# Altium PCB PCB1.PcbDoc
Units mm, origin at the board's own origin, x right, y up, seen from the top; angles counter-clockwise.
Board outline 109.9 x 81.78 mm, 2 copper layers (Top Layer, Bottom Layer), stack 0.98 mm thick; 50 components, 26 nets, 129 pads, 26 vias.
Unrouted connection lines stored in the file: 5.
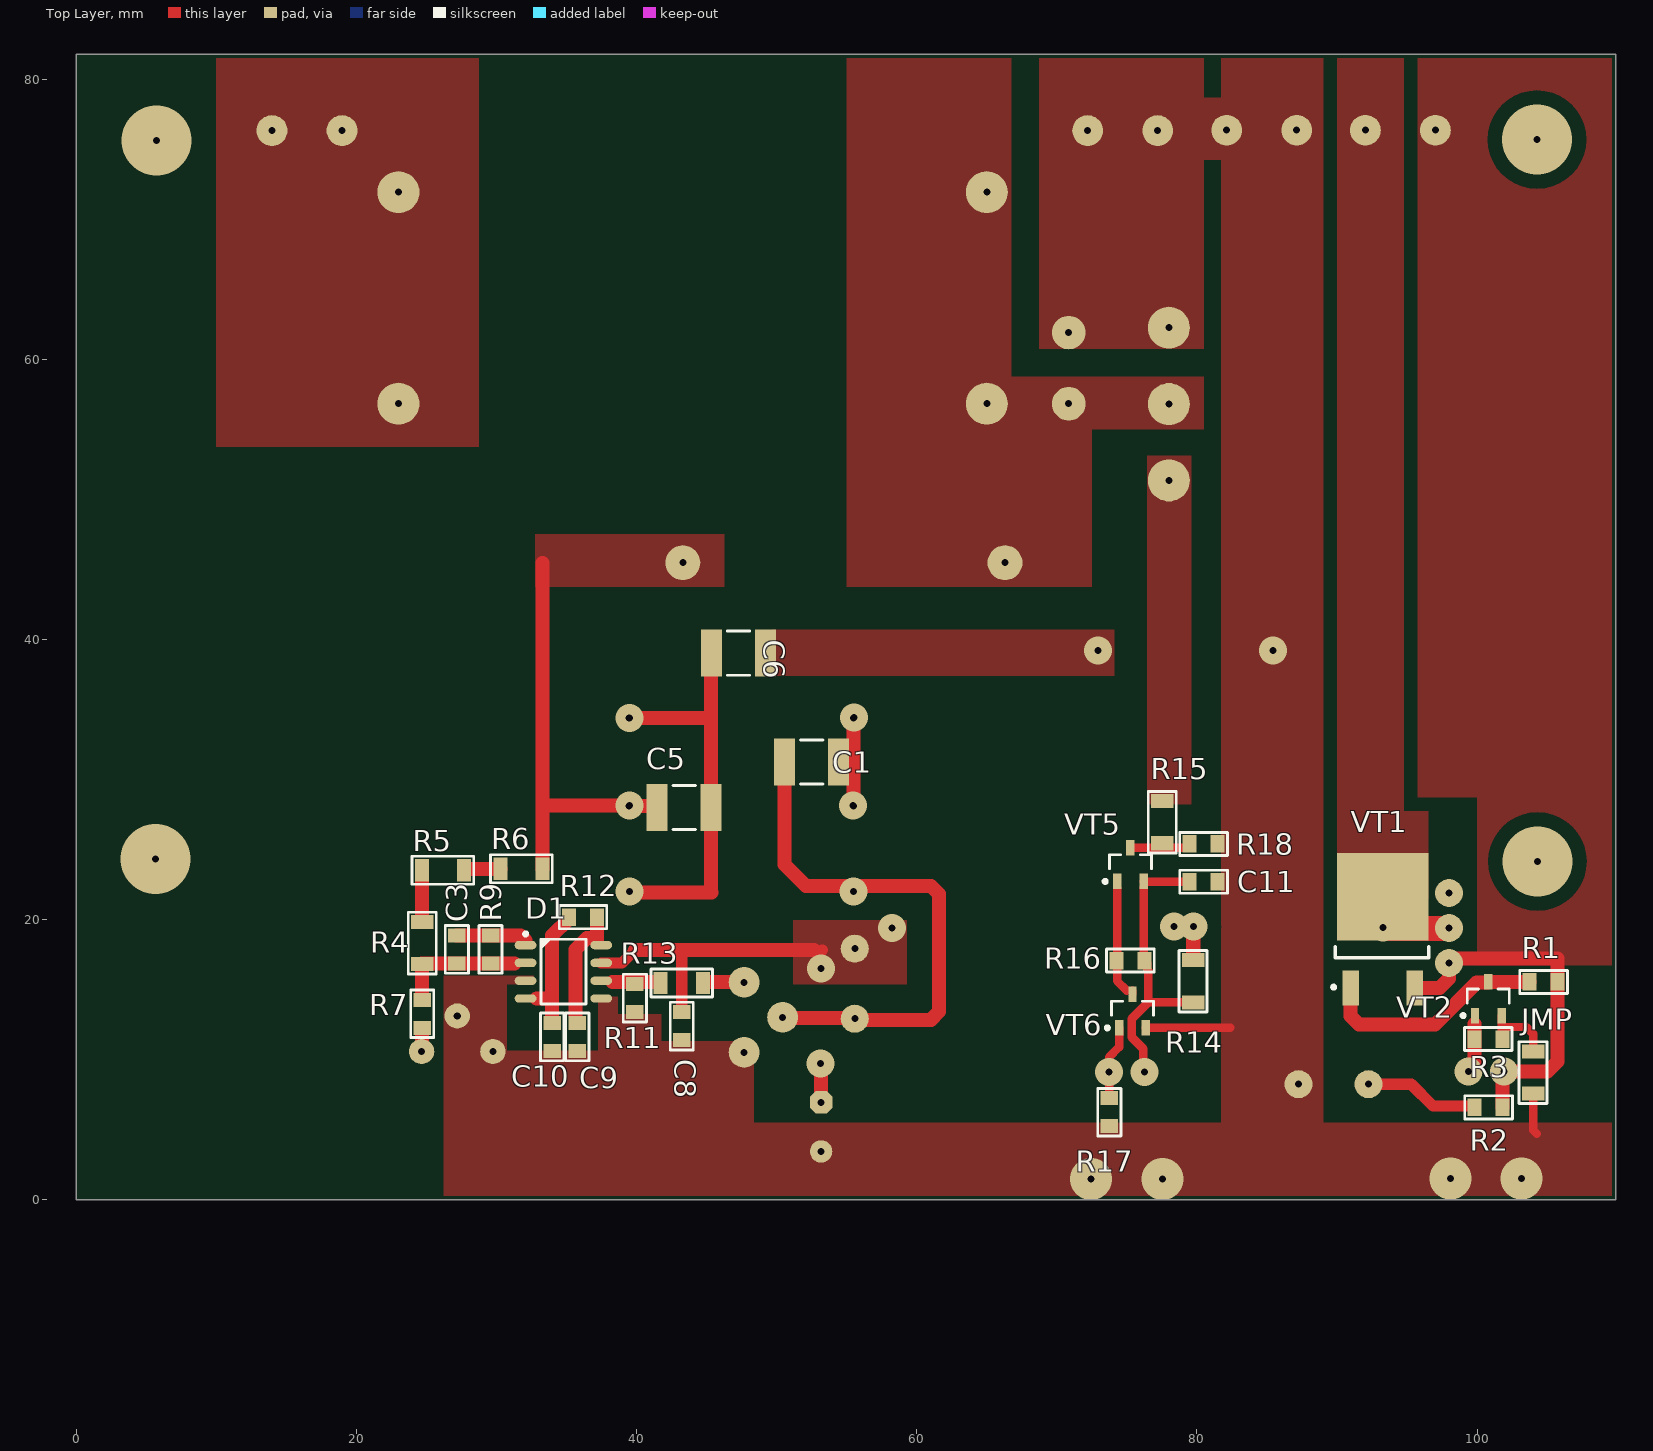
[diagram p0: Top Layer view]
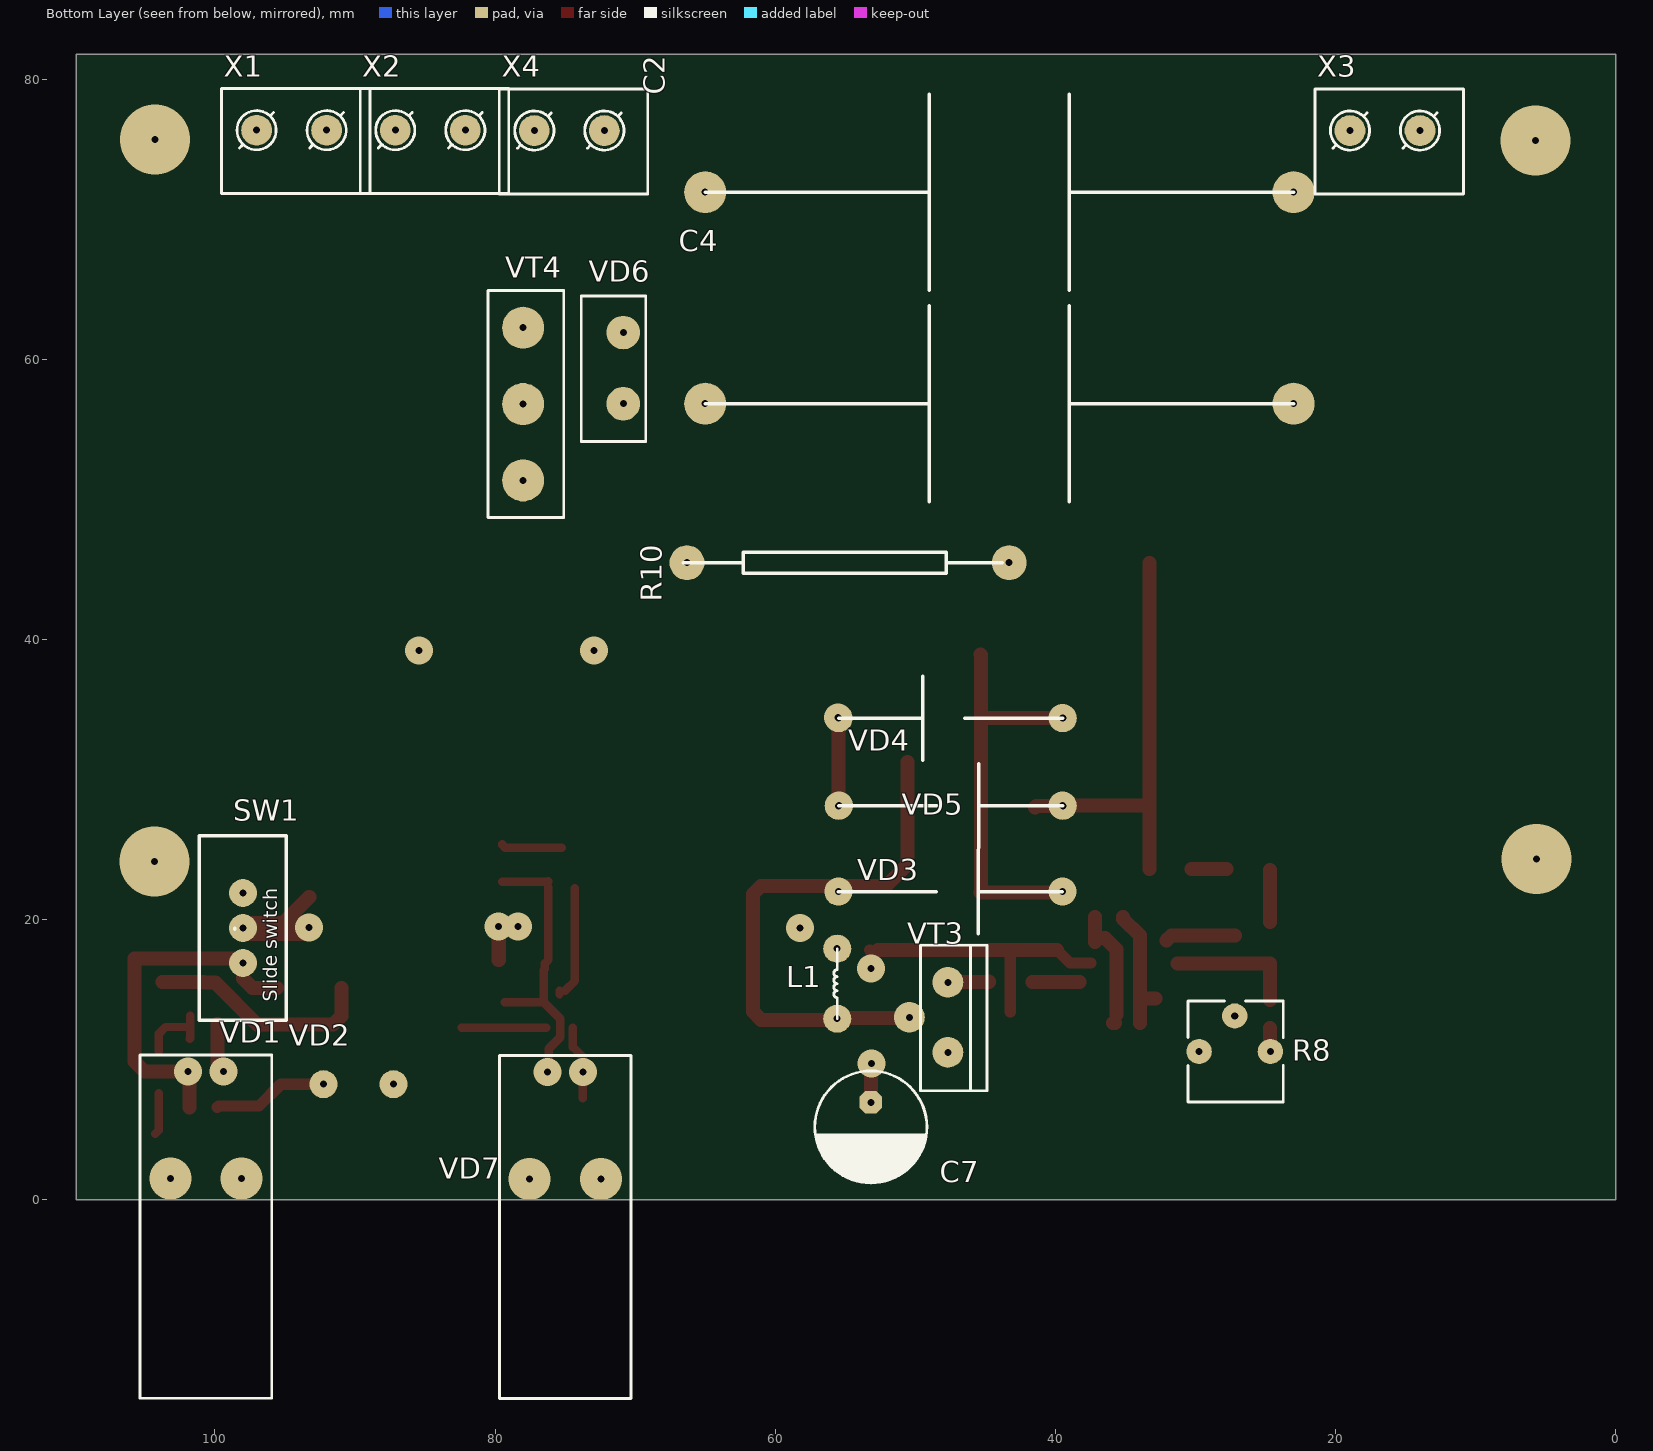
[diagram p1: Bottom Layer view, seen from below]
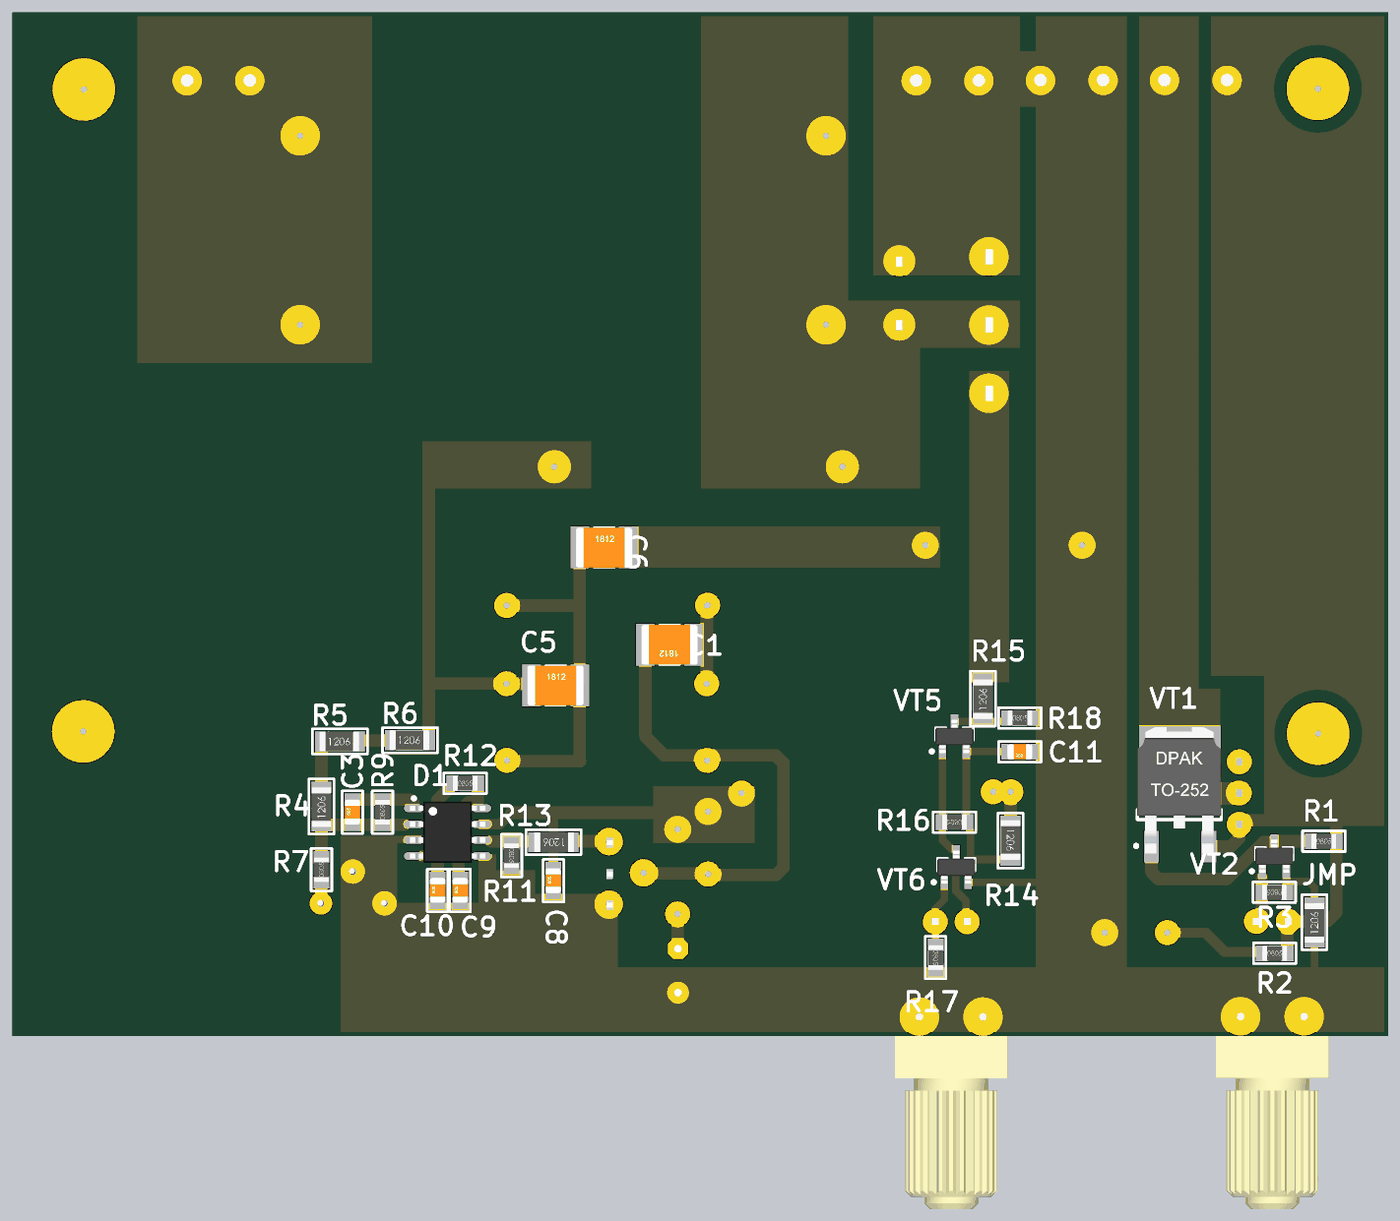
[diagram p2: 3D render of the assembled board from above, using the file's embedded part models]
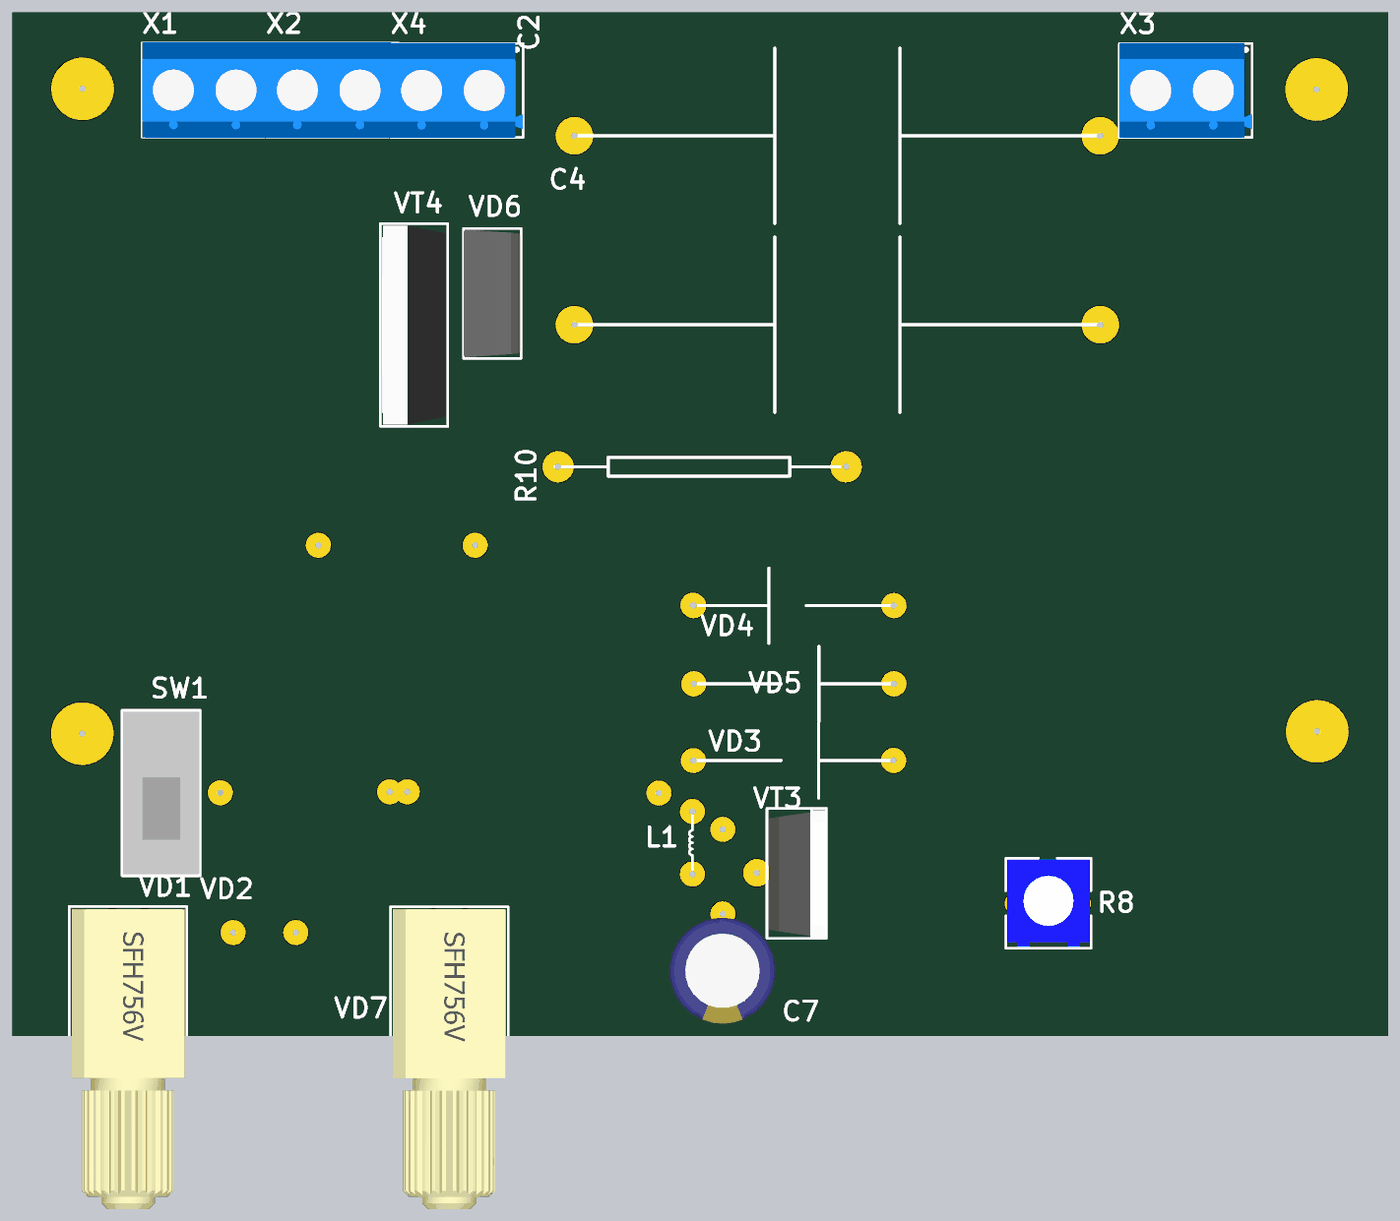
[diagram p3: 3D render of the assembled board from below, using the file's embedded part models]

## Layer stack, top to bottom
Top Solder: solder mask 0.0102, Solder Resist, Dk 3.5
Top Layer: signal copper 0.0356
Dielectric 1: dielectric 0.909, FR-4, Dk 4.8
Bottom Layer: signal copper 0.0356
Bottom Solder: solder mask 0.0102, Solder Resist, Dk 3.5

## Board outline
0,0 0,81.775 109.9,81.775 109.9,0

## Design rules (kind name [scope] priority, off if disabled: settings)
BoardOutlineClearance [All] p1: gap=0.3 ignorepadtopadclearanceinfootprint=FALSE
Clearance Clearance_MultiLayerPad [OnLayer('Multi-Layer') and IsPad] p1: gap=0.3 ignorepadtopadclearanceinfootprint=FALSE except(0: Arc-Hole Track-Hole SMDPad-Hole THPad-Hole Via-Hole Fill-Hole Poly-Hole Region-Hole Text-Hole)
Clearance Clearance_Polygon [InPolygon] p2: gap=0.2 ignorepadtopadclearanceinfootprint=FALSE except(0: Arc-Hole Track-Hole SMDPad-Hole THPad-Hole Via-Hole Fill-Hole Poly-Hole Region-Hole Text-Hole; 0.3: Arc-Poly Arc-Region Track-Poly Track-Region SMDPad-Poly SMDPad-Region THPad-Poly THPad-Region Via-Region Fill-Poly Fill-Region Poly-Poly Poly-Region Poly-Text Region-Region; 1: Via-Poly)
Clearance [All] p3: gap=0.2 ignorepadtopadclearanceinfootprint=FALSE except(0: Arc-Hole Track-Hole SMDPad-Hole THPad-Hole Via-Hole Fill-Hole Poly-Hole Region-Hole Text-Hole)
ComponentClearance [All] p1: gap=-5 collisioncheckmode=3 verticalgap=0.5 showdistances=FALSE
DiffPairsRouting [All] p1: maxlimit=0.4 minlimit=0.2 mostfreqgap=0.2 toplayer_minwidth=0.2 toplayer_maxwidth=0.3 toplayer_prefwidth=0.2 bottomlayer_minwidth=0.2 bottomlayer_maxwidth=0.3 bottomlayer_prefwidth=0.2 maxuncoupledlength=12.7
Height [All] p1: minheight=0 maxheight=50 prefheight=12.7
HoleSize [All] p1: absolutevalues=TRUE maxlimit=10 minlimit=0.2 maxpercent=80.000 minpercent=20.000
HoleToHoleClearance [All] p1: gap=0.3 allowstackedmicrovias=TRUE
MinimumSolderMaskSliver [All] p1: minsoldermaskwidth=0.2
PlaneClearance [All] p1: clearance=0
PlaneConnect [All] p1: planeconnectstyle=Direct reliefexpansion=0.5 reliefentries=4 reliefconductorwidth=0.5 reliefairgap=0.3
PolygonConnect PolygonConnect_PadGND [InNet('GND') and IsPad] p1: connectstyle=Direct reliefconductorwidth=0.5 reliefentries=4 polygonreliefangle="90 Angle" airgapwidth=0.3
PolygonConnect PolygonConnect_Via [IsVia] p2: connectstyle=Direct reliefconductorwidth=0.254 reliefentries=4 polygonreliefangle="90 Angle" airgapwidth=0.254
PolygonConnect [All] p3: connectstyle=Direct reliefconductorwidth=0.5 reliefentries=4 polygonreliefangle="90 Angle" airgapwidth=0.3
RoutingTopology [All] p1: topology=Vertical
RoutingVias [All] p1: holewidth=0.2 width=0.4 viastyle="Through Hole" minholewidth=0.2 minwidth=0.4 maxholewidth=0.5 maxwidth=1.2
SilkToSolderMaskClearance [IsPad] p1: minsilkscreentomaskgap=0.2 clearancetoexposedcopper=TRUE
SolderMaskExpansion [All] p1: expansion=0.075 istentingtop=FALSE
Width [All] p1: maxlimit=10 minlimit=0.2 preferedwidth=0.2
20 further rules are at their usual default settings.

## Components (designator, comment, footprint, x,y, rotation, side; value= is the part's Value field where it differs from the comment)
C1 "Ceramic capacitor, 0.068, X7R, ±10%, 630V, 1812, -55...+125°C" "CAP: 1812" 52.5,31.25 r180 top value=0.068
C2 "DHRB34C102M2FB 1000пФ х 15кВ" "CAP: HV_CYL_METALL-PAPER_CAP" 44,71.925 r0 bottom
C3 "Ceramic capacitor, 100pF, X7R, ±10%, 16V, 0805, -55...+125°C" "CAP: 0805" 27.175,17.875 r90 top value=100pF
C4 "DHRB34C102M2FB 1000пФ х 15кВ" "CAP: HV_CYL_METALL-PAPER_CAP" 44,56.825 r0 bottom
C5 "Ceramic capacitor, 0.068, X7R, ±10%, 630V, 1812, -55...+125°C" "CAP: 1812" 43.4,28 r0 top value=0.068
C6 "Ceramic capacitor, 0.068, X7R, ±10%, 630V, 1812, -55...+125°C" "CAP: 1812" 47.275,39.025 r0 top value=0.068
C7 "Aluminium capacitor, 470μF, 25V, ±20%, 54mOhm, 14x10x5 mm, -55...+105°C" "CAP: D8C3.5H12" 53.175,5.2 r270 bottom value=470μF
C8 "Ceramic capacitor, 1uF, X7R, ±10%, 16V, 0805, -55...+125°C" "CAP: 0805" 43.225,12.399 r90 top value=1uF
C9 "Ceramic capacitor, 1uF, X7R, ±10%, 16V, 0805, -55...+125°C" "CAP: 0805" 35.775,11.625 r90 top value=1uF
C10 "Ceramic capacitor, 2200pF, X7R, ±10%, 16V, 0805, -55...+125°C" "CAP: 0805" 33.975,11.625 r90 top value=2200pF
C11 "Ceramic capacitor, 4.7μF, X7R, ±10%, 16V, 0805, -55...+125°C" "CAP: 0805" 80.475,22.7 r180 top value=4.7μF
D1 "PWM controller, supply 10...30V, 500kHz, External switch, -40...+105°C, 8-SOIC" 8-SOIC 34.775,16.275 r0 top
JMP "Resistor film, 3R3, ±5%, 1206, 0.25W, -55...+125°C" "RES: 1206" 104,9.075 r90 top value=3R3 (schematic designator R15)
L1 "470uH" "IND: DUMBELL 8.5x11x5" 55.575,15.425 r90 bottom
R1 "Resistor film, 20k, ±5%, 0805, 0.125W, -55...+125°C" "RES: 0805" 104.75,15.55 r0 top value=20k
R2 "Resistor film, 2k, ±5%, 0805, 0.125W, -55...+125°C" "RES: 0805" 100.825,6.6 r0 top value=2k
R3 "Resistor film, 100k, ±5%, 0805, 0.125W, -55...+125°C" "RES: 0805" 100.8,11.475 r180 top value=100k
R4 "Resistor film, 4M3, ±5%, 1206, 0.25W, -55...+125°C" "RES: 1206" 24.7,18.325 r90 top value=4M3
R5 "Resistor film, 4M3, ±5%, 1206, 0.25W, -55...+125°C" "RES: 1206" 26.175,23.525 r0 top value=4M3
R6 "Resistor film, 4M3, ±5%, 1206, 0.25W, -55...+125°C" "RES: 1206" 31.775,23.625 r0 top value=4M3
R7 "Resistor film, 36k, ±5%, 0805, 0.125W, -55...+125°C" "RES: 0805" 24.7,13.275 r90 top value=36k
R8 "Resistor film, 10k, ±10%, 3296W, 0.5W, -55...+125°C" "RES: 3362P" 29.74,10.585 r180 bottom value=10k
R9 "Resistor film, 2.2M, ±5%, 0805, 0.125W, -55...+125°C" "RES: 0805" 29.575,17.875 r90 top value=2.2M
R10 "ТВО" "RES: ТВО 0.5" 54.8,45.475 r0 bottom
R11 "Resistor film, 10R, ±5%, 1206, 0.25W, -55...+125°C" "RES: 1206" 43.225,15.475 r180 top value=10R
R12 "Resistor film, 20k, ±5%, 0805, 0.125W, -55...+125°C" "RES: 0805" 36.175,20.175 r0 top value=20k
R13 "Resistor film, 470R, ±5%, 0805, 0.125W, -55...+125°C" "RES: 0805" 39.875,14.4 r270 top value=470R
R14 "Resistor film, 10R, ±5%, 1206, 0.25W, -55...+125°C" "RES: 1206" 79.725,15.6 r270 top value=10R
R15 "Resistor film, 3R3, ±5%, 1206, 0.25W, -55...+125°C" "RES: 1206" 77.525,26.951 r90 top value=3R3
R16 "Resistor film, 4k7, ±5%, 0805, 0.125W, -55...+125°C" "RES: 0805" 75.25,17.075 r180 top value=4k7
R17 "Resistor film, 20k, ±5%, 0805, 0.125W, -55...+125°C" "RES: 0805" 73.75,6.25 r270 top value=20k
R18 "Resistor film, 100R, ±5%, 0805, 0.125W, -55...+125°C" "RES: 0805" 80.475,25.4 r0 top value=100R
SW1 "Slide switch" "SW: Slide_switch 3mm between outputs" 98,19.4 r90 bottom
VD1 "SHF250" "LED: SFH757" 100.64,5.335 r180 bottom
VD2 "LED, Green, *, *, *, -55...+150°C" "through component 5 mm" 89.75,8.25 r180 bottom
VD3 "HER108" "DIODE: DO-41" 47.5,22 r180 bottom
VD4 "HER108" "DIODE: DO-41" 47.475,34.375 r0 bottom
VD5 "HER108" "DIODE: DO-41" 47.475,28.125 r180 bottom
VD6 "Single diode, 75V, 150mA, 1V, 4ns, SOD-323, -55...+150°C" TO220(D) 70.85,56.825 r90 bottom
VD7 "SHF250" "LED: SFH757" 74.99,5.31 r180 bottom
VT1 "MOSFET P-channel transistor, 20V, 2.6A, 2.9nC, 2.5W, 135mOhm, 220pF, SOT-23, -55...+150°C" DPAK 93.265,18.375 r90 top
VT2 "NPN transistor, 45V, 100mA, 100MHz, 300mW, 0.6V, 420, SOT-23, -55...+125°C" SOT23 100.8,14.35 r90 top
VT3 "MOSFET N-channel transistor, 80V, 7A, 9.1nC, 2.5W, 34mOhm, 756pF, 8-TDSON, -55...+150°C" "TO-220 HV" 47.675,13.025 r270 bottom
VT4 "IGBT transistor, 650V, 40A, 40nC, 144W, 2.1V, 22ns/73ns, TO247, -55...+125°C" TO247 78,56.8 r90 bottom
VT5 "MOSFET P-channel transistor, 20V, 2.6A, 2.9nC, 2.5W, 135mOhm, 220pF, SOT-23, -55...+150°C" SOT23 75.25,23.925 r90 top
VT6 "NPN transistor, 45V, 100mA, 100MHz, 300mW, 0.6V, 420, SOT-23, -55...+125°C" SOT23 75.4,13.475 r90 top
X1 "Terminal connector, 2pin, 3.5mm, 300VAC, 10A" "CON: KF301-5.0-2P" 94.3,75.525 r0 bottom
X2 "Terminal connector, 2pin, 3.5mm, 300VAC, 10A" "CON: KF301-5.0-2P" 84.4,75.525 r0 bottom
X3 "Terminal connector, 2pin, 3.5mm, 300VAC, 10A" "CON: KF301-5.0-2P" 16.25,75.5 r0 bottom
X4 "Terminal connector, 2pin, 3.5mm, 300VAC, 10A" "CON: KF301-5.0-2P" 74.475,75.5 r0 bottom

## Footprints (in the part's own frame and the unit in brackets; to place one, negate y for a bottom-side part, rotate by r counter-clockwise, add the part's x,y. Pads: shape width x height; smd on the part's side, far side on the other; paste and mask are expansions set on the pad)
8-SOIC [mm] "pitch 1.27 mm"
  rrect100% 1.55x0.6 smd: 1(-2.7,1.905) 2(-2.7,0.635) 3(-2.7,-0.635) 4(-2.7,-1.905) 5(2.7,-1.905) 6(2.7,-0.635) 7(2.7,0.635) 8(2.7,1.905)
  round 0.7 on Mech1: 28(-2.395,1.8)
  silkscreen extent -2.82,-2.3 1.61,2.82, body extent -3,-2.45 3,2.45, height 1.75
"CAP: 0805" [mm]
  rect 1x1.25 smd: 1(-1,0) 2(1,0)
  silkscreen extent -1.7,-0.82 1.7,0.82, body extent -1,-0.62 1,0.63, height 0.78
"CAP: 1812" [mm]
  rect 1.5x3.35 smd: 1(-1.925,0) 2(1.925,0)
  silkscreen extent -0.8,-1.58 0.8,1.58, body extent -2.25,-1.6 2.25,1.6, height 1.6
"CAP: D8C3.5H12" [mm]
  oct 1.6x1.6 hole 0.5: 1(-1.75,0)
  round 1.6 hole 0.5: 2(1.75,0)
  silkscreen extent -4,-4 4,4, body extent -4.25,-4.25 4.25,4.25, height 13
"CAP: HV_CYL_METALL-PAPER_CAP" [mm]
  round 3 hole 0.5: 1(-21,0) 2(21,0)
  silkscreen extent -21,-7 21,7
"CON: KF301-5.0-2P" [mm]
  round 2.2 hole 0.5: 1(2.725,-0.825) 2(-2.275,-0.825)
  round 0.5 on Bottom Overlay: ""(-4.875,-3.3)
  silkscreen extent -5.38,-3.8 5.23,3.7, body extent -5.37,-3.85 5.23,3.75, height 10
"DIODE: DO-41" [mm]
  round 2 / inner round 1.524 / far side round 1.524 hole 0.5: 1(-8,0) 2(8,0)
  silkscreen extent -8,-3 8,3
DPAK [mm]
  rect 2.5x1.2 smd: 1(-3.25,2.29) 3(-3.25,-2.29)
  rect 6.25x6.5 smd: 2(3.25,0)
  round 0.5 on Mech1: ""(-3.2,2.9)
  silkscreen extent -3.32,-3.3 -0.3,3.62, body extent -3.8,-3.32 6.3,3.42, height 2.37
"IND: DUMBELL 8.5x11x5" [mm]
  round 2 hole 0.5: 1(-2.5,0) 2(2.5,0)
  silkscreen extent -2.5,0 2.5,0.25
"LED: SFH757" [mil]
  round 60 hole 19.68: 1(50,150) 2(-50,150) 3(-100,-150) 4(100,-150)
  silkscreen extent -185,-768 185,197, body extent -177,-756 177,189, height 390
"RES: 0805" [mm]
  rect 1x1.25 smd: 1(-1,0) 2(1,0)
  silkscreen extent -1.7,-0.82 1.7,0.82, body extent -1,-0.6 1,0.6, height 0.44
"RES: 1206" [mm]
  rect 1x1.6 smd: 1(-1.5,0) 2(1.5,0)
  silkscreen extent -2.2,-1 2.2,1, body extent -1.65,-0.8 1.55,0.8, height 0.47
"RES: 3362P" [mm]
  round 1.8 hole 0.5: 1(0,0) 2(2.54,2.54) 3(5.08,0)
  silkscreen extent -0.8,-3.6 6,3.6, body extent -0.7,-3.49 5.9,3.5, height 4.5
"RES: ТВО 0.5" [mm]
  round 2.5 hole 0.5: 1(-11.5,0) 2(11.5,0)
  silkscreen extent -11,-0.75 11.75,0.75
SOT23 [mm]
  rect 1.1x0.6 smd: 1(-1.2,0.95) 2(-1.2,-0.95) 3(1.2,0)
  round 0.5 on Mech1: ""(-0.9,1.1)
  silkscreen extent -1.32,-1.5 0.7,1.92, body extent -1.32,-1.52 1.32,1.52, height 1.12
"SW: Slide_switch 3mm between outputs" [mm]
  round 2 hole 0.5: 1(0,0) 2(-2.5,0) 3(2.5,0)
  silkscreen extent -6.6,-3.1 6.6,3.1, body extent -6.5,-3.05 6.5,3.05, height 10
"through component 5 mm" [mm]
  round 2 hole 0.5: 1(-2.5,0) 2(2.5,0)
TO220(D) [mm]
  round 2.4 hole 0.5: 1(5.08,0) 2(0,0)
  round 0.5 on Mech2: ""(-2,-1)
  silkscreen extent -2.7,-1.6 7.7,3, body extent -2.59,-1.53 7.59,2.98, height 21.15
TO247 [mm] "3-Lead Plastic TO-247"
  round 3 hole 0.5: 1(-5.45,0) 2(0,0) 3(5.45,0)
  round 0.5 on Mech2: ""(-7.4,-2.3)
  silkscreen extent -8.1,-2.9 8.1,2.5, body extent -7.95,-2.75 7.95,2.35, height 26.95
"TO-220 HV" [mm]
  round 2.2 hole 0.5: 1(-2.5,0) 2(0,-2.75) 3(2.5,0)
  silkscreen extent -5.15,-1.95 5.25,2.8, body extent -5,-1.8 5.2,2.7, height 22.06

## Part data
C1 C5 C6: library part Ceramic_1812, Manufacturer=Yageo, Package=1812, PartNumber=CC1812KKX7R9BB105, Temperature=-55...+125°C, Tolerance=±10%, TypeCapacitor="Ceramic capacitor", TypeDielectric=X7R, Voltage=630V, HelpURL=https://www.digikey.com/product-detail/en/yageo/CC1812KKX7R9BB105/311-2068-1-ND/5195970, ValueManufacturerPartNumber="Ceramic capacitor, 0.068, X7R, ±10%, 630V, 1812, -55...+125°C"
C2 C4: library part THROUGH_HOLE_CAP
C3 C8 C9 C10 C11: library part Ceramic_0805, Manufacturer=Yageo, Package=0805, PartNumber=CC0805KRX7R7BB104, Temperature=-55...+125°C, Tolerance=±10%, TypeCapacitor="Ceramic capacitor", TypeDielectric=X7R, Voltage=16V, HelpURL=https://www.digikey.com/product-detail/en/yageo/CC0805KRX7R7BB104/311-1142-1-ND/303052
  C3: ValueManufacturerPartNumber="Ceramic capacitor, 100pF, X7R, ±10%, 16V, 0805, -55...+125°C"
  C8 C9: ValueManufacturerPartNumber="Ceramic capacitor, 1uF, X7R, ±10%, 16V, 0805, -55...+125°C"
  C10: ValueManufacturerPartNumber="Ceramic capacitor, 2200pF, X7R, ±10%, 16V, 0805, -55...+125°C"
  C11: ValueManufacturerPartNumber="Ceramic capacitor, 4.7μF, X7R, ±10%, 16V, 0805, -55...+125°C"
C7: library part Aluminium, Manufacturer=Wurth, Package="14x10x5 mm", PartNumber=860080475013, Temperature=-55...+105°C, Tolerance=±20%, TypeCapacitor="Aluminium capacitor", Voltage=25V, HelpURL=https://www.digikey.com/product-detail/en/wurth-electronics-inc/860080475013/732-9029-1-ND/5728972, Impedance=54mOhm, ValueManufacturerPartNumber="Aluminium capacitor, 470μF, 25V, ±20%, 54mOhm, 14x10x5 mm, -55...+105°C"
D1: library part UC3842BVD1R2G, "PWM controller", Frequency=500kHz, Manufacturer="ON Semiconductor", Package=8-SOIC, PartNumber=KA3845, Temperature=-40...+105°C, VoltageInput="supply 10...30V", ComponentType="PWM controller", HelpURL=https://www.digikey.com/product-detail/en/on-semiconductor/UC3842BVD1R2G/UC3842BVD1R2GOSCT-ND/5802572, OutputType="External switch", ValueManufacturerPartNumber="PWM controller, supply 10...30V, 500kHz, External switch, -40...+105°C, 8-SOIC"
JMP R4 R5 R6 R11 R14 R15: library part Resistor_1206, Manufacturer=Yageo, Package=1206, PartNumber=RC1206JR-07100RL, Power=0.25W, Temperature=-55...+125°C, Tolerance=±5%, TypeResistor="Resistor film", HelpURL=https://www.digikey.com/product-detail/en/yageo/RC1206JR-07100RL/311-100ERCT-ND/732153
  JMP R15: ValueManufacturerPartNumber="Resistor film, 3R3, ±5%, 1206, 0.25W, -55...+125°C"
  R4 R5 R6: ValueManufacturerPartNumber="Resistor film, 4M3, ±5%, 1206, 0.25W, -55...+125°C"
  R11 R14: ValueManufacturerPartNumber="Resistor film, 10R, ±5%, 1206, 0.25W, -55...+125°C"
L1: library part Inductor_dumbbell
R1 R2 R3 R7 R9 R12 R13 R16 R17 R18: library part Resistor_0805, Manufacturer=Yageo, Package=0805, PartNumber=RC0805JR-07100RL, Power=0.125W, Temperature=-55...+125°C, Tolerance=±5%, TypeResistor="Resistor film", HelpURL=https://www.digikey.com/product-detail/en/yageo/RC0805JR-07100RL/311-100ARCT-ND/731185
  R1 R12 R17: ValueManufacturerPartNumber="Resistor film, 20k, ±5%, 0805, 0.125W, -55...+125°C"
  R2: ValueManufacturerPartNumber="Resistor film, 2k, ±5%, 0805, 0.125W, -55...+125°C"
  R3: ValueManufacturerPartNumber="Resistor film, 100k, ±5%, 0805, 0.125W, -55...+125°C"
  R7: ValueManufacturerPartNumber="Resistor film, 36k, ±5%, 0805, 0.125W, -55...+125°C"
  R9: ValueManufacturerPartNumber="Resistor film, 2.2M, ±5%, 0805, 0.125W, -55...+125°C"
  R13: ValueManufacturerPartNumber="Resistor film, 470R, ±5%, 0805, 0.125W, -55...+125°C"
  R16: ValueManufacturerPartNumber="Resistor film, 4k7, ±5%, 0805, 0.125W, -55...+125°C"
  R18: ValueManufacturerPartNumber="Resistor film, 100R, ±5%, 0805, 0.125W, -55...+125°C"
R8: library part Trimmer, Manufacturer=Bourns, Package=3296W, PartNumber=3296W-1-103LF, Power=0.5W, Temperature=-55...+125°C, Tolerance=±10%, TypeResistor="Resistor film", HelpURL=https://www.digikey.com/product-detail/en/bourns-inc/3296W-1-103LF/3296W-103LF-ND/1088045, ValueManufacturerPartNumber="Resistor film, 10k, ±10%, 3296W, 0.5W, -55...+125°C"
R10: library part "HV RESISTOR"
SW1: library part Slide_switch
VD2: library part LED_single, Color=GREEN, ColorParameter=Green, Temperature=-55...+150°C, TypeDiode=LED, ValueManufacturerPartNumber="LED, Green, *, *, *, -55...+150°C"
VD3 VD4 VD5: library part Through_hole_single_diode
VD6: library part Diode_single, Current=150mA, Manufacturer="Micro Commercial", Package=SOD-323, PartNumber=HFA08TB120, Temperature=-55...+150°C, Voltage=75V, VoltageDrop=1V, HelpURL=https://www.digikey.com/product-detail/en/micro-commercial-co/1N4148WX-TP/1N4148WXTPMSCT-ND/717312, RecoveryTime=4ns, TypeDiode="Single diode", ValueManufacturerPartNumber="Single diode, 75V, 150mA, 1V, 4ns, SOD-323, -55...+150°C"
VT1: library part MOSFET_P_132, CurrentDS=2.6A, InputCapacitor=220pF, Manufacturer="Infineon Technologies", MaxPower=2.5W, Package=SOT-23, PartNumber=IRFU5305, Temperature=-55...+150°C, VoltageDS=20V, GateCharge=2.9nC, HelpURL=https://www.digikey.com/product-detail/en/infineon-technologies/IRLML2246TRPBF/IRLML2246TRPBFCT-ND/2639576, RDS=135mOhm, TypeTransistor="MOSFET P-channel transistor", ValueManufacturerPartNumber="MOSFET P-channel transistor, 20V, 2.6A, 2.9nC, 2.5W, 135mOhm, 220pF, SOT-23, -55...+150°C"
VT2: library part BJT_NPN_132, CurrentCE=100mA, CurrentGain=420, Frequency=100MHz, Manufacturer="ON Semiconductor", MaxPower=300mW, Package=SOT-23, PartNumber=BC817, Temperature=-55...+125°C, VoltageCE=45V, VoltageSaturation=0.6V, HelpURL=https://www.digikey.com/product-detail/en/on-semiconductor/BC847CLT1G/BC847CLT1GOSCT-ND/917836, TypeTransistor="NPN transistor", ValueManufacturerPartNumber="NPN transistor, 45V, 100mA, 100MHz, 300mW, 0.6V, 420, SOT-23, -55...+125°C"
VT3: library part MOSFET_N_123, CurrentDS=7A, InputCapacitor=756pF, Manufacturer="Infineon Technologies", MaxPower=2.5W, Package=8-TDSON, PartNumber=STF6NK90Z, Temperature=-55...+150°C, VoltageDS=80V, GateCharge=9.1nC, HelpURL=https://www.digikey.com/product-detail/en/infineon-technologies/BSC340N08NS3GATMA1/BSC340N08NS3GATMA1TR-ND/2080655, RDS=34mOhm, TypeTransistor="MOSFET N-channel transistor", ValueManufacturerPartNumber="MOSFET N-channel transistor, 80V, 7A, 9.1nC, 2.5W, 34mOhm, 756pF, 8-TDSON, -55...+150°C"
VT4: library part IGBT, CurrentCE=40A, Manufacturer="Rohm Semiconductor", MaxPower=144W, Package=TO247, PartNumber=IRG4PH50U, Temperature=-55...+125°C, VoltageCE=650V, VoltageSaturation=2.1V, GateCharge=40nC, HelpURL=https://www.digikey.com/product-detail/en/rohm-semiconductor/RGTH40TS65GC11/RGTH40TS65GC11-ND/5029953, TimeOnOff=22ns/73ns, TypeTransistor="IGBT transistor", ValueManufacturerPartNumber="IGBT transistor, 650V, 40A, 40nC, 144W, 2.1V, 22ns/73ns, TO247, -55...+125°C"
VT5: library part MOSFET_P_132, CurrentDS=2.6A, InputCapacitor=220pF, Manufacturer="Infineon Technologies", MaxPower=2.5W, Package=SOT-23, PartNumber=IRLML9303, Temperature=-55...+150°C, VoltageDS=20V, GateCharge=2.9nC, HelpURL=https://www.digikey.com/product-detail/en/infineon-technologies/IRLML2246TRPBF/IRLML2246TRPBFCT-ND/2639576, RDS=135mOhm, TypeTransistor="MOSFET P-channel transistor", ValueManufacturerPartNumber="MOSFET P-channel transistor, 20V, 2.6A, 2.9nC, 2.5W, 135mOhm, 220pF, SOT-23, -55...+150°C"
VT6: library part BJT_NPN_132, CurrentCE=100mA, CurrentGain=420, Frequency=100MHz, Manufacturer="ON Semiconductor", MaxPower=300mW, Package=SOT-23, PartNumber=PMBT2379, Temperature=-55...+125°C, VoltageCE=45V, VoltageSaturation=0.6V, HelpURL=https://www.digikey.com/product-detail/en/on-semiconductor/BC847CLT1G/BC847CLT1GOSCT-ND/917836, TypeTransistor="NPN transistor", ValueManufacturerPartNumber="NPN transistor, 45V, 100mA, 100MHz, 300mW, 0.6V, 420, SOT-23, -55...+125°C"
X1 X2 X3 X4: library part Connector_terminal_2pin, CurrentMax=10A, Manufacturer=Degson, PartNumber=DG350-3.5-02P-14, VoltageMax=300VAC, CommentText="\"Разъем\"", HelpURL=https://www.chipdip.ru/product/dg350-3.5-02p-12, Multichannel=2pin, Pitch=3.5mm, TypeConnector="Terminal connector", ValueManufacturerPartNumber="Terminal connector, 2pin, 3.5mm, 300VAC, 10A"

## Via types
v1: diameter 2, hole 0.5, Top Layer to Bottom Layer, 18 vias
v2: diameter 3, hole 0.5, Top Layer to Bottom Layer, 4 vias
v3: diameter 5, hole 0.5, Top Layer to Bottom Layer, 4 vias

## Nets (pads, with @x,y where several pads share a name; then routed paths per layer and width w, separated by ;. In a path a pad name is that pad's centre, name@x,y a point inside that pad or via, vN(x,y) a via of type N, cw(c..) or ccw(c..) an arc to the next point about the centre after c; other vN are vias at no path point)
Gate_IGBT: R15.2 VT4.1 | length 0.3
  Top Layer w1: VT4.1@77.925,51.225 VT4.1@78,51.3
  Top Layer w2: VT4.1@77.85,51.2 VT4.1
GND: C6.2 C7.2 C8.1 C9.1 C10.1 C11.1 D1.3 D1.5 JMP.1 JMP.2 R3.1 R8.1 R8.2 R13.2 R17.2 R18.2 VD1.3 VD1.4 VD2.2 VD6.1 VD7.3 VD7.4 VT2.2 VT3.3 VT4.3 VT6.2 X2.1 X2.2 X4.1 X4.2 | length 14.4
  Top Layer w0.6: VT6.2 82.375,12.275 82.4,12.3 ; VT2.2 101.75,12.337 ; R3.1 101.75,11.525 101.75,12.337 ; JMP.1@104,7.6 104,4.975 104.25,4.725 ; JMP.2@104,10.6 104,11.85 103.513,12.337 101.75,12.337
  other v1: 72.925,39.2 85.446,39.205
  other v2: 72.45,1.5 77.53,1.5 98.1,1.525 103.18,1.525
NetC1_1: C1.1 VD4.2 VD5.1 | length 6.3
  Top Layer w1: VD5.1 55.475,29.1 VD4.2
  other v1: 55.462,28.137 55.537,34.412
NetC1_2: C1.2 L1.1 VD3.1 VT3.2 | length 39.1
  Top Layer w1: VT3.2 50.475,12.975 55.525,12.975 55.65,12.85 61.014,12.85 61.6,13.436 61.6,21.814 61.014,22.4 55.5,22.4 52.1,22.4 50.575,23.925 C1.2
  other v1: 55.5,22
NetC2_1: C2.1 C4.1 X3.1 X3.2
NetC2_2: C2.2 C4.2 R10.2 VD6.2 VT4.2
NetC3_1: C3.1 D1.2 R4.1 R7.2 R9.1 | length 9.1
  Top Layer w1: R7.2 R4.1 ; R4.1@24.7,16.875 31.275,16.875
NetC3_2: C3.2 D1.1 R9.2 | length 5
  Top Layer w1: C3.2 R9.2 31.725,18.875 32.075,18.525
NetC5_1: C5.1 R6.2 R10.1 VD5.2 | length 30.1
  Top Layer w1: R6.2 33.275,28.15 ; 33.275,45.45 33.275,28.15 ; VD5.2@39.45,28.15 33.275,28.15 ; VD5.2 41.35,28.125 C5.1 ; R10.1@43.275,45.45 R10.1
  other v1: 39.487,28.137
NetC5_2: C5.2 C6.1 VD3.2 VD4.1 | length 28.8
  Top Layer w1: VD3.2@39.475,21.925 39.488,21.937 45.35,21.937 45.325,21.962 C5.2 45.325,34.35 ; v1(39.487,34.387) VD4.1 45.3,34.375 45.325,34.35 ; C6.1@45.35,38.925 45.325,38.9 45.325,34.35
  other v1: 39.512,22.012
NetC9_2: C9.2 D1.8 R12.2 | length 8.5
  Top Layer w1: 35.65,13.211 35.65,17.875 36.451,18.676 36.904,18.676 37.175,18.405 R12.2 ; C9.2@35.75,12.625 C9.2@35.875,12.625
NetC10_2: C10.2 D1.4 R12.1 | length 9.2
  Top Layer w1: 32.875,14.37 33.92,14.37 33.975,14.425 ; C10.2 33.975,14.425 ; R12.1 35.175,20.05 33.975,18.85 33.975,14.425
NetC11_2: C11.2 R14.2 R16.1 VD7.2 VT5.2 | length 20.3
  Top Layer w0.6: VT5.2@76.2,22.3 76.2,17.125 76.45,16.875 76.45,16.474 76.525,16.399 76.525,14.1 ; VT5.2 76.2,22.713 79.462,22.713 C11.2 ; VD7.2@76.262,9.123 v1(76.26,9.12) 76.171,9.209 76.171,10.782 75.35,11.603 75.35,12.925 76.525,14.1 ; R14.2@79.325,14.1 76.525,14.1
NetD1_6: D1.6 R11.2 R13.1 | length 3.4
  Top Layer w1: 38.275,15.54 R11.2@41.625,15.54
NetR1_1: R1.1 VT1.1 VT2.3 | length 16.3
  Top Layer w1: VT1.1 90.975,13.111 91.561,12.525 97,12.525 99.975,15.5 100.75,15.5 VT2.3 R1.1
NetR1_2: R1.2 R2.2 SW1.2 VD1.2 VT1.3 X1.1 | length 25.7
  Top Layer w1: VT1.3 97.325,15.125 98,15.8 SW1.2 SW1.2@98.075,16.975 ; SW1.2@98.075,17.225 105.75,17.225 R1.2 105.75,15.132 105.75,9.875 105.02,9.145 v1(101.91,9.145) 101.825,9.06 R2.2
NetR2_1: R2.1 VD2.1 | length 8.3
  Top Layer w0.8: VD2.1 95.3,8.25 96.85,6.7 99.725,6.7 R2.1
NetR3_2: R3.2 VD1.1 VT2.1 | length 3.6
  Top Layer w1: v1(99.37,9.145) 99.37,9.287 99.8,9.717 R3.2 99.8,12.55
NetR4_2: R4.2 R5.1 | length 3.7
  Top Layer w1: R5.1 24.7,23.5 R4.2
NetR5_2: R5.2 R6.1 | length 2.5
  Top Layer w1: R5.2@27.775,23.6 30.275,23.6 R6.1
NetR7_1: R7.1 R8.3 | length 1.7
  Top Layer w0.6: R7.1@24.68,12.255 R7.1
  Top Layer w1: R8.3 24.68,10.605 R7.1@24.68,12.255
NetR11_1: R11.1 VT3.1 | length 3
  Top Layer w1: R11.1@44.725,15.575 44.725,15.55 47.65,15.55 VT3.1
NetR15_1: R15.1 R18.1 VT5.3 | length 4.4
  Top Layer w0.6: VT5.3 79.275,25.125 79.475,25.325 R18.1
NetR16_2: R16.2 VT5.1 VT6.3 | length 7.9
  Top Layer w0.6: VT5.1@74.3,22.25 74.3,15.625 75,14.925 ; VT6.3 VT6.3@75.4,14.925
NetR17_1: R17.1 VD7.1 VT6.1 | length 5.3
  Top Layer w0.6: R17.1 73.75,9.12 73.75,10.15 73.725,10.175 74.45,10.9 VT6.1
  other v1: 73.72,9.12
VCC: C7.1 C8.2 D1.7 L1.2 R14.1 SW1.1 VT1.2 X1.2 | length 32.3
  Top Layer w0.8: D1.7 38.96,16.91 39.875,17.825 ; C8.2 43.225,17.8 ; 53.225,17.8 53.25,17.825
  Top Layer w1: 39.875,17.825 52.675,17.825 ; C7.1@53.15,6.975 v1@53.15,9.275 ; L1.2@55.475,17.825 L1.2 ; R14.1 79.738,17.1 79.738,19.488 v1(79.75,19.5) ; VT1.2 VT1.2@95.49,19.4
  Top Layer w1.8: VT1.2@93.775,19.375 97.975,19.375 SW1.1
  other v1: 53.143,9.74 53.15,16.5 58.25,19.4 93.275,19.425 78.35,19.5
pads on no net: D1.28 SW1.3 VD6. VT1. VT2. VT4. VT5. VT6. X1. X2. X3. X4.
copper on no net:
  other v3: 104.3,24.15 5.675,24.325 5.725,75.625 104.275,75.675

## Polygon pours and split planes (outlines as drawn)
GND on Top Layer "GND_L01_P053" (solid, pour order 53): 76.25,78.675 83.5,78.675 83.5,74.225 76.25,74.225
GND on Top Layer "GND_L01_P052" (solid, pour order 52): 80.5,81.5 68.75,81.5 68.75,60.75 80.5,60.75
Gate_IGBT on Top Layer "GATE_IGBT_L01_P023" (solid, pour order 23): 79.6,53.125 79.6,28.25 76.45,28.25 76.45,53.125
GND on Top Layer "GND_L01_P026" (solid, pour order 26): 109.9,0.25 109.9,5.5 26.25,5.5 26.25,0.25
VCC on Top Layer "VCC_L01_P045" (solid, pour order 45): 59.3,19.95 51.2,19.95 51.2,15.4 59.3,15.4
NetR1_2 on Top Layer "NETR1_2_L01_P051" (solid, pour order 51): 100,16.75 100,29 109.5,29 109.601,29.006 109.601,18.742 109.601,16.75
NetC2_2 on Top Layer "NETC2_2_L01_P035" (solid, pour order 35): 72.5,55.25 72.5,43.75 55,43.75 55,55.25
NetC2_2 on Top Layer "NETC2_2_L01_P034" (solid, pour order 34): 80.5,55 80.5,58.75 66.75,58.75 66.75,81.5 55,81.5 55,55
GND on Top Layer "GND_L01_P040" (solid, pour order 40): 49.65,37.4 49.65,40.7 74.1,40.7 74.1,37.4
NetC5_1 on Top Layer "NETC5_1_L01_P047" (solid, pour order 47): 46.25,43.75 32.775,43.75 32.775,47.5 46.25,47.5
NetR1_2 on Top Layer "NETR1_2_L01_P004" (solid, pour order 4): 95.75,28.75 95.75,81.5 109.9,81.5 109.9,28.75
GND on Top Layer "GND_L01_P010" (solid, pour order 10): 81.75,81.5 89,81.5 89,0.25 81.75,0.25
no net on Top Layer "NONET_L01_P044" (solid, pour order 44): 69.5,20.75
no net on Top Layer "NONET_L01_P043" (solid, pour order 43): 70.25,20.75
no net on Top Layer "NONET_L01_P042" (solid, pour order 42): 69.9,20.4
no net on Top Layer "NONET_L01_P041" (solid, pour order 41): 69.9,20.4
no net on Top Layer "NONET_L01_P039" (solid, pour order 39): 52.6,37.4
GND on Top Layer "GND_L01_P037" (solid, pour order 37): 38.5,8.75 39.25,8.75 39.25,3.5 38.5,3.5
no net on Top Layer "NONET_L01_P033" (solid, pour order 33): 80,55
NetC2_1 on Top Layer "NETC2_1_L01_P032" (solid, pour order 32): 10,81.5 10,53.75 28.75,53.75 28.75,81.5
GND on Top Layer "GND_L01_P031" (solid, pour order 31): 32.675,16 26.25,16 26.25,4 48.35,4 48.35,11.325 41.75,11.325 41.75,13.25 38.65,13.25 38.65,14.5 37.25,14.5 37.25,10.625 30.75,10.625 30.75,15.4 32.675,15.4
NetR1_2 on Top Layer "NETR1_2_L01_P019" (solid, pour order 19): 99.75,28.25
NetR1_2 on Top Layer "NETR1_2_L01_P018" (solid, pour order 18): 99.5,28.25
GND on Top Layer "GND_L01_P007" (solid, pour order 7): 81.75,60.75 81.75,38.75 84.5,38.75 84.5,60.75
VCC on Top Layer "VCC_L01_P009" (solid, pour order 9): 90,81.5 94.75,81.5 94.75,27.75 96.5,27.75 96.5,21.5 90,21.5 90,67.5
no net on Top Layer "NONET_L01_P001" (solid, pour order 1): 83.575,81.65

## Silkscreen, mask and mechanical layers (free items; w line width, h text height)
Border:
  lines w0.2: 0,81.775 0,0 109.9,0

## Dimensions
0,0 to 0,81.775 on Size
0,81.775 to 109.9,81.775 on Size